# Altium PCB imx6_base_board_lcd7_r1.PcbDoc (part 6 of 6)
Units mil, origin at the board's own origin, x right, y up, seen from the top; angles counter-clockwise.
Board outline 7480.32 x 5118.11 mil, 4 copper layers (Top Layer, Internal Plane 1, Internal Plane 2, Bottom Layer), stack 30.635 mil thick; 518 components, 398 nets, 1886 pads, 1407 vias.
Unrouted connection lines stored in the file: 12.
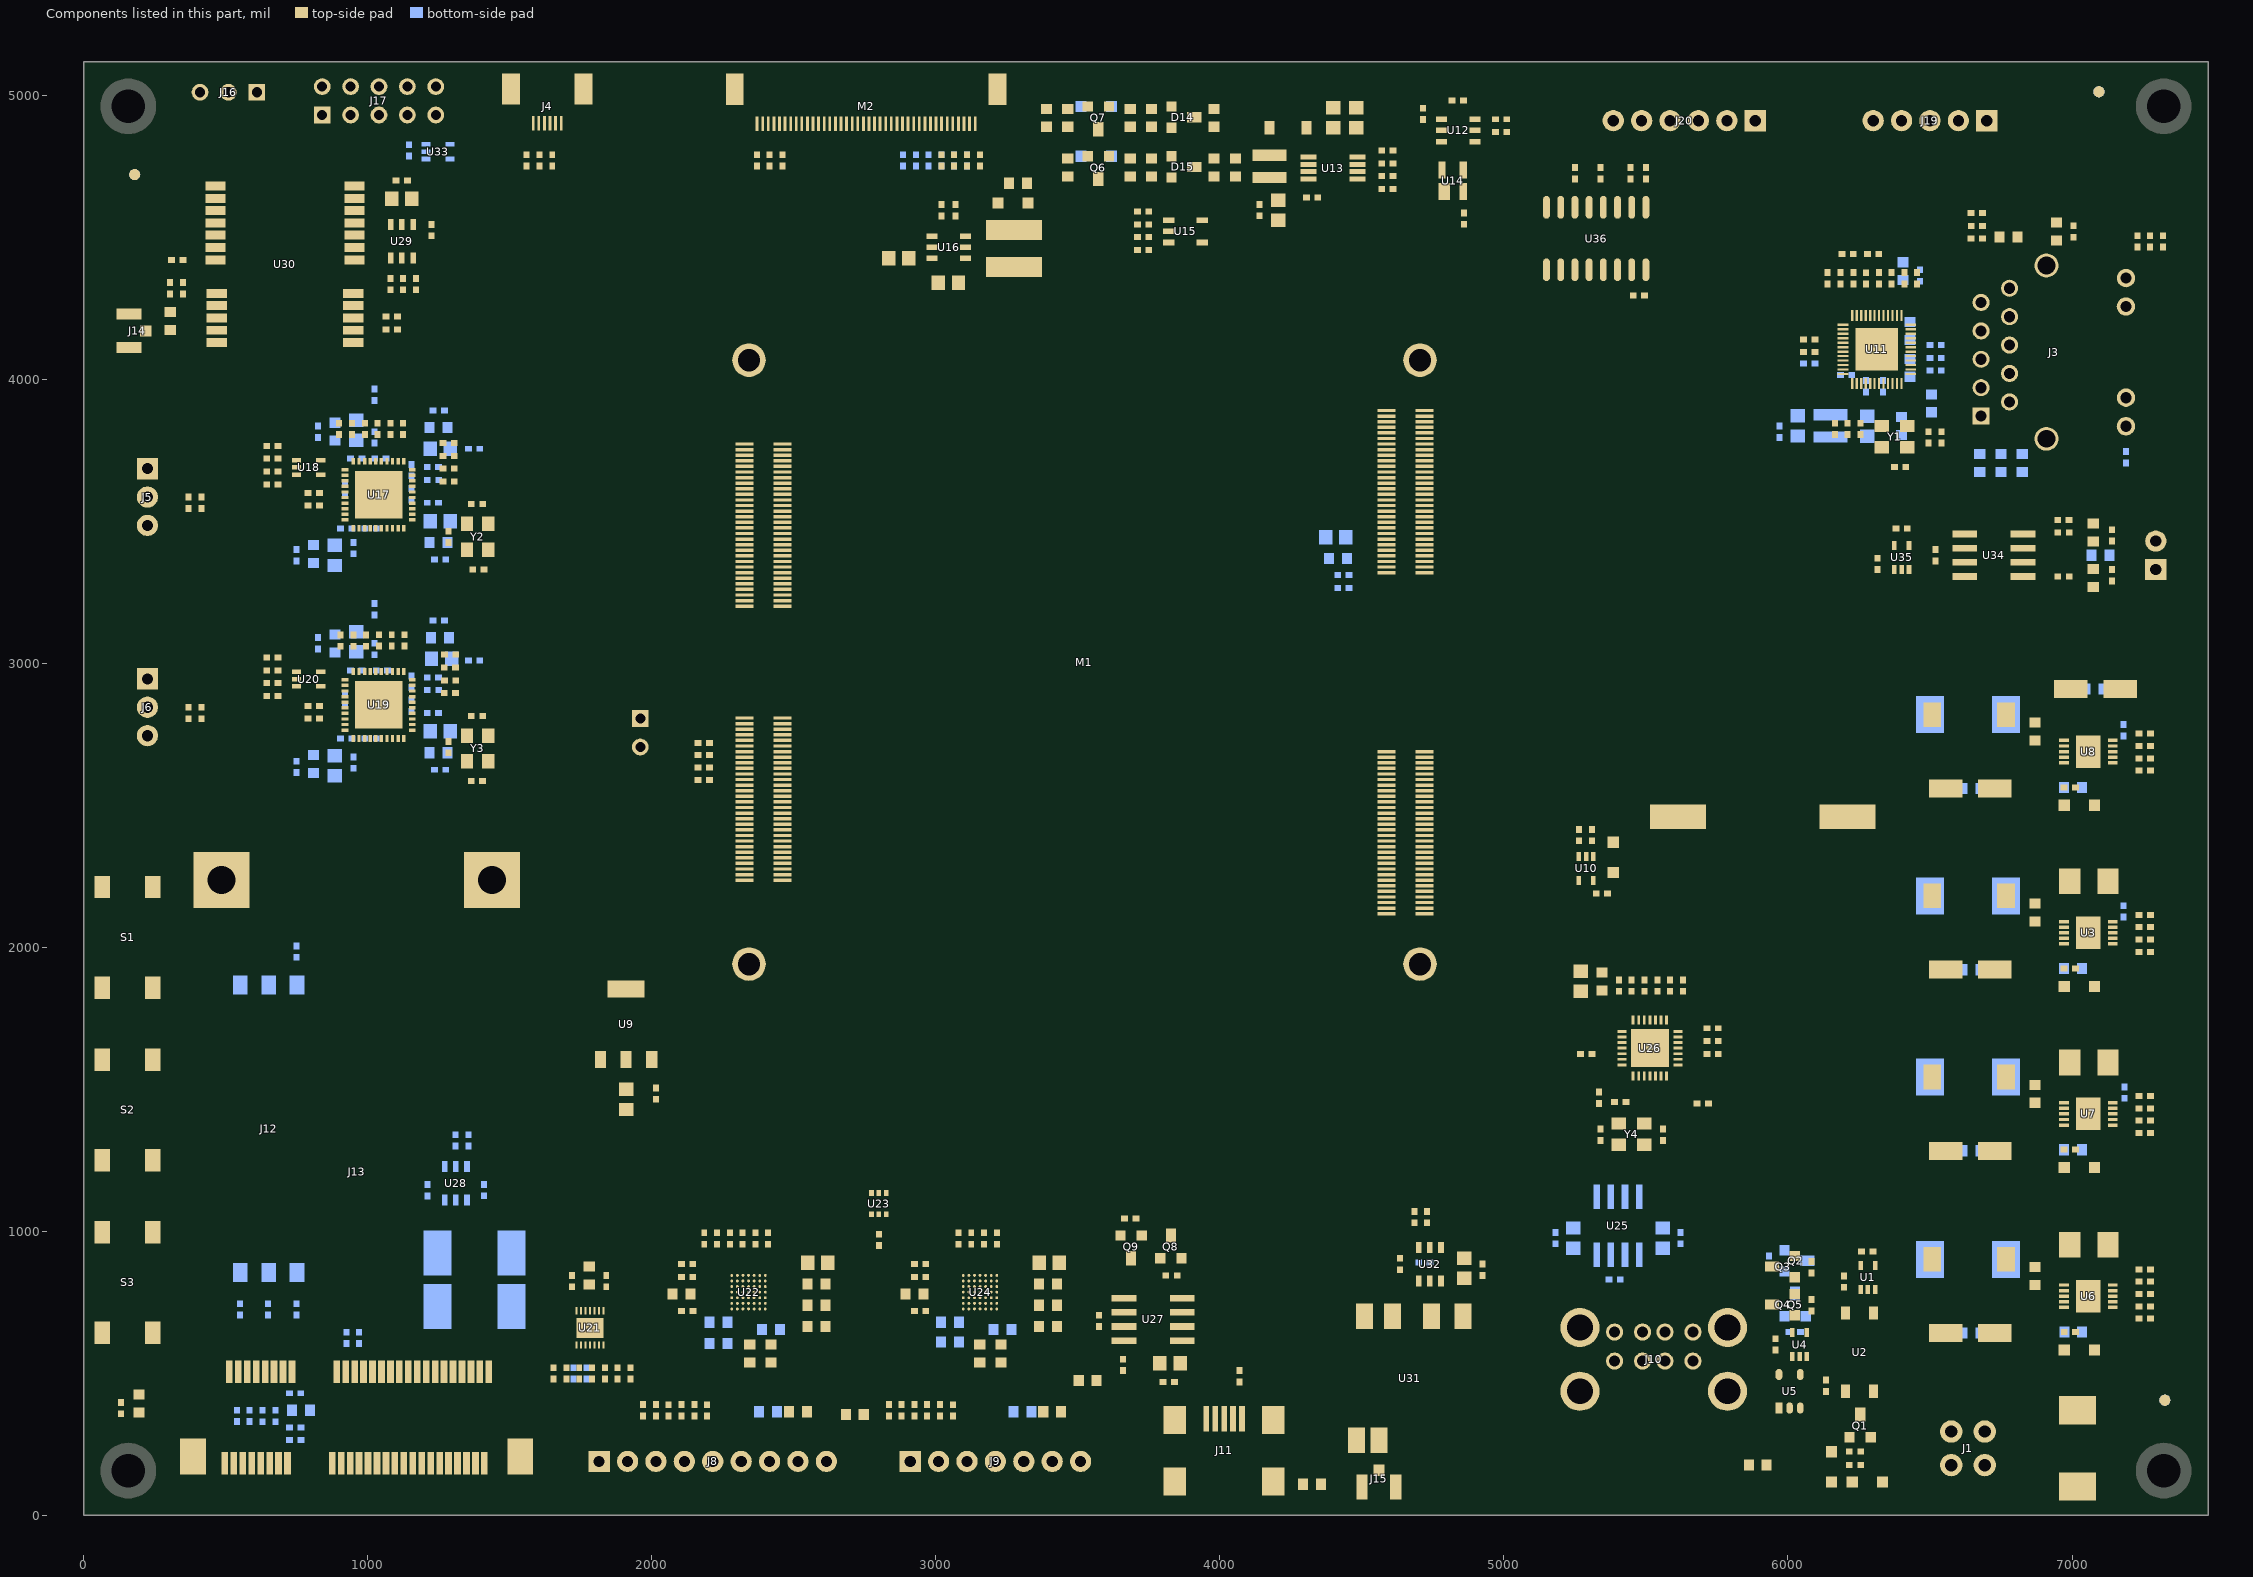
[diagram p8: the components of this part, seen from the top]

## Polygon pours and split planes (outlines as drawn) (continued)
GND on Bottom Layer "Top Layer-No Net" (solid, remove dead copper, pour order 120): 6417.32,2283.46 6578.74,2283.46 6578.74,1984.25 6417.32,1984.25
NetC3_1 on Bottom Layer "Top Layer-No Net" (solid, remove dead copper, pour order 117): 6696.85,2287.4 6834.65,2287.4 6834.65,2047.24 6622.05,2047.24 6622.05,2287.4
GND on Bottom Layer "Top Layer-No Net" (solid, remove dead copper, pour order 107): 6421.26,1007.87 6590.55,1007.87 6590.55,724.41 6421.26,724.41
NetC9_1 on Bottom Layer "Top Layer-No Net" (solid, remove dead copper, pour order 101): 6704.72,1007.87 6826.77,1007.87 6826.77,767.72 6633.86,767.72 6633.86,1007.87
NetC15_1 on Bottom Layer "Top Layer-No Net" (solid, remove dead copper, pour order 80): 6645.67,1661.42 6834.65,1661.42 6834.65,1417.32 6622.05,1417.32 6622.05,1661.42
GND on Bottom Layer "Top Layer-No Net" (solid, remove dead copper, pour order 105): 6448.82,1633.86 6578.74,1633.86 6578.74,1366.14 6417.32,1366.14 6417.32,1633.86
VBUS2 on Bottom Layer "Top Layer-No Net" (solid, remove dead copper, pour order 119): 19 vertices, not listed, extent 5350.39,606.3 5649.61,972.44
VBUS1 on Bottom Layer "Top Layer-No Net" (solid, remove dead copper, pour order 121): 28 vertices, not listed, extent 5102.36,503.94 5429.13,972.44
P5V0 on Bottom Layer "Top Layer-No Net" (solid, remove dead copper, pour order 123): 5358.27,807.09 5385.83,807.09 5385.83,854.33 5397.64,866.14 5397.64,992.13 5397.64,1062.99 5318.9,1062.99 5318.9,992.13 5358.27,992.13 5358.27,862.2 5350.39,854.33 5350.39,850.39 5350.39,807.09
CELL-3V3 on Bottom Layer "Top Layer-No Net" (solid, remove dead copper, pour order 79): 1175,1140 1275,1140 1315,1140 1325,1130 1325,645 1315,635 1090,635 1080,645 1080,1130 1090,1140
GND on Bottom Layer "Top Layer-No Net" (solid, remove dead copper, pour order 83): 1485,1020 1585,1020 1640,1020 1650,1010 1650,645 1640,635 1450,635 1440,645 1440,1010 1450,1020
P3V3 on Bottom Layer "Top Layer-No Net" (solid, remove dead copper, pour order 87): 1240,1195 1265,1195 1285,1195 1285,1305 1275,1315 1135,1315 1125,1305 1125,1205 1135,1195
VGND2 on Bottom Layer "Top Layer-No Net" (solid, remove dead copper, pour order 98): 20 vertices, not listed, extent 925,3050 1070,3175
AGND1 on Internal Plane 1 (split plane): 17 vertices, not listed, extent 1680.1,20.1 2704.9,959.9
VGND1 on Internal Plane 1 (split plane): 17 vertices, not listed, extent 155.1,3410.1 1179.9,3939.9
AGND2 on Internal Plane 1 (split plane): 19 vertices, not listed, extent 2820.1,20.1 3519.9,949.9
VGND2 on Internal Plane 1 (split plane): 17 vertices, not listed, extent 155.1,2660.1 1179.9,3174.9
GND on Internal Plane 1 (split plane): 55 vertices, not listed, extent 20.1,20.1 7460.22,5098.01
CPU-3V3 on Internal Plane 2 (split plane): 43 vertices, not listed, extent 4380.17,1954.97 7197.53,3080.46
ETH_AVDDL on Internal Plane 2 (split plane): 30 vertices, not listed, extent 6135.1,3900.1 6544.9,4149.9
VBAT on Internal Plane 2 (split plane): 65 vertices, not listed, extent 6644.99,20.1 7460.22,2689.65
P5V0 on Internal Plane 2 (split plane): 62 vertices, not listed, extent 2293.55,20.1 7197.53,1159.2
12V-CAM on Internal Plane 2 (split plane): 46 vertices, not listed, extent 20.1,2719.8 7460.22,5098.01
LCD-3V3 on Internal Plane 2 (split plane): 4909.91,4280.09 2270.09,4280.09 2270.09,4906.19 4909.91,4906.19
P3V3 on Internal Plane 2 (split plane): 155 vertices, not listed, extent 20.1,20.1 7248.71,4906.19
CELL-3V3 on Internal Plane 2 (split plane): 1554.91,20.1 20.1,20.1 20.1,1144.91 1554.91,1144.91

## Keep-outs
Keep-Out Layer:
  the board outline again, w10

## Other copper
Internal Plane 1 (plane layer: these items are gaps in the copper):
  lines w10: 1675,-5 1675,965 1895,965 1895,720 2310,720 2310,955 2365,955 ; 2355,955 2710,955 2710,0 ; 2785,0 2815,0 2815,455 2950,455 2950,720 3125,720 3125,955 3520,955 3525,955 3525,520 3525,30 3525,0 ; 150,2655 515,2655 515,2950 1185,2950 1185,3180 325,3180 325,2805 150,2805 150,2655 ; 150,3405 515,3405 515,3700 1185,3700 1185,3945 325,3945 325,3545 150,3545 150,3405
Internal Plane 2 (plane layer: these items are gaps in the copper):
  lines w10: 6130,3955 6305,3955 6305,3895 6395,3895 6395,3990 6465,3990 6465,3920 6550,3920 6550,3990 6550,4155 6280,4155 6280,4110 6215,4110 6165,4110 6130,4110 6130,3955
  lines w20: 0,1155 130,1155 1565,1155 1565,0 ; 2260,4921.26 2260,4270 4920,4270 4920,4921.26 ; 2283.46,0 2283.46,440.94 ; 2283.46,401.57 2283.46,610.24 3650,610.24 3650,805 3765,805 4039.76,805 4039.76,610.24 5098.43,610.24 5098.43,1169.29 5748.03,1169.29 5748.03,433.07 6397.64,433.07 6397.64,1137.8 6712.6,1137.8 ; 6338.58,3090.55 4370.08,3090.55 4370.08,2606.3 5826.77,2606.3 5826.77,1944.88 6629.92,1944.88
  lines w30: 3.94,2913.39 3.94,2885 421.26,2885 421.26,4181.1 421.26,4921.26 511.81,4921.26 6968.5,4921.26 6968.5,4704.72 7263.78,4704.72 7263.78,3157.48 6338.58,3157.48 6338.58,2704.72 6629.92,2704.72 ; 6881.89,0 6881.89,578.74 7212.6,578.74 7212.6,1137.8 6629.92,1137.8 6629.92,1366.14 6633.86,1370.08 7212.6,1370.08 7212.6,1799.21 6629.92,1799.21 6629.92,2062.99 7212.6,2062.99 7212.6,2456.69 6629.92,2456.69 6629.92,2704.72 ; 7476.38,2704.72 6629.92,2704.72

## Silkscreen, mask and mechanical layers (free items; w line width, h text height)
Top Overlay:
  lines w6: 1050,4390 1360,4390 1360,4250 1035,4250 1035,4390 1065,4390 ; 1240,4005 1350,4005 1350,3605 1230,3605 1230,4005 1255,4005 ; 1250,3245 1365,3245 1365,2860 1240,2860 1235,2860 1235,3245 1260,3245 ; 4545,4840 4650,4840 4650,4450 4520,4450 4520,4840 4555,4840 ; 595,3065 850,3065 850,3030 1170,3030 1175,3025 1175,3200 595,3200 595,3065 ; 595,3815 850,3815 850,3770 1175,3770 1175,3935 720,3935 595,3935 595,3815 ; 2805,4700 3195,4700 3195,4825 2805,4825 2805,4700
  lines w7: 6145,4670 6515,4670 6515,4295 6085,4295 6085,4670 6170,4670

## Text inside footprints (layer, text, board x,y; h text height)
J12: Bottom Overlay "VCC" at 534.53,914.45 h27.56 r270; Bottom Overlay "RST" at 633.35,914.45 h27.56 r270; Bottom Overlay "CLK" at 732.17,914.45 h27.56 r270; Bottom Overlay "GND" at 534.53,1642.4 h27.56 r270; Bottom Overlay "DAT" at 731.77,1642.4 h27.56 r270
J13: Top Overlay "51" at 1441.18,169.61 h27.56; Top Overlay "52" at 1456.18,499.61 h27.56; Top Overlay "2" at 466.18,499.61 h27.56; Top Overlay "1" at 456.18,169.61 h27.56
J17: Top Overlay "10" at 1300,5010 h27.56; Top Overlay "9" at 1300,4910 h27.56; Top Overlay "1" at 760,4910 h27.56; Top Overlay "2" at 740,5010 h27.56